# EAGLE board CSNE_Hirose_TDT_AdptBrd (EAGLE 7.4.0)
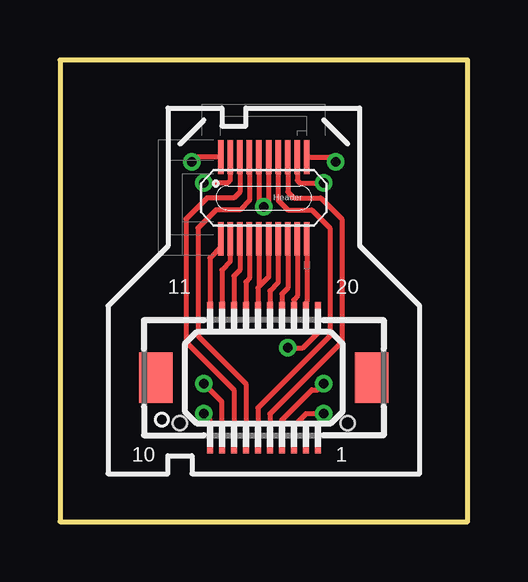
[diagram p0: board, top side]
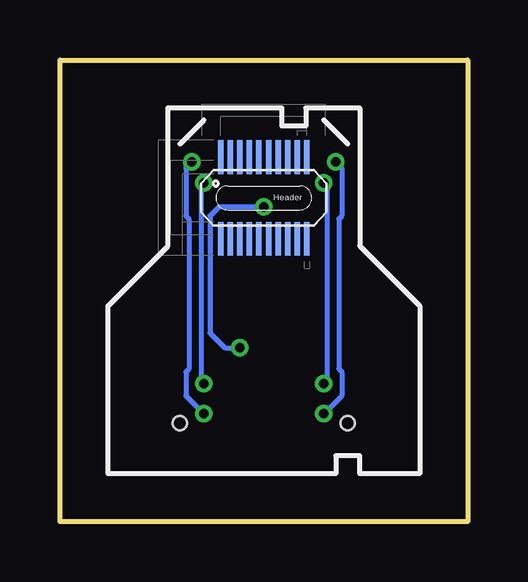
[diagram p1: board, bottom side, seen from below]

Size 17 x 19.25 mm. Coordinates in mm from the lower left corner, seen from the top.
Outline: 0,0 17,0 17,19.25 0,19.25 0,0
Copper layers (1*2*15*16): Top 0.035mm / dielectric 0.45mm / Route2 0.035mm / dielectric 0.5mm / Route15 0.035mm / dielectric 0.45mm / Bottom 0.035mm
Design rules "LaenPCBOrder_MOD_4layer": minimum track width 6mil, minimum drill 13mil, track to track 6mil, track to pad 6mil, pad to pad 6mil, via to via 6mil, smd to smd 6mil, copper to edge 15mil, drill to drill 6mil, minimum pad ring 7mil, minimum via ring 7mil, stop-mask expansion 3mil, vias tented up to drill 0mil, thermal gap 10mil

## Footprints (pad centres in the part's own frame; a part is rotated, then mirrored left to right if it is on the bottom)
DF30FC-20DP-0.4V = smd 0.23 x 1.4: P$1 -1.8,1.7; P$2 -1.4,1.7; P$3 -1,1.7; P$4 -0.6,1.7; P$5 -0.2,1.7; P$6 0.2,1.7; P$7 0.6,1.7; P$8 1,1.7; P$9 1.4,1.7; P$10 1.8,1.7; P$11 1.8,-1.7; P$12 1.4,-1.7; P$13 1,-1.7; P$14 0.6,-1.7; P$15 0.2,-1.7; P$16 -0.2,-1.7; P$17 -0.6,-1.7; P$18 -1,-1.7; P$19 -1.4,-1.7; P$20 -1.8,-1.7
CON-DF17-20F = smd 0.25 x 1.1: 1 -2.25,-2.6; 2 -2.25,2.6; 3 -1.75,-2.6; 4 -1.75,2.6; 5 -1.25,-2.6; 6 -1.25,2.6; 7 -0.75,-2.6; 8 -0.75,2.6; 9 -0.25,-2.6; 10 -0.25,2.6; 11 0.25,-2.6; 12 0.25,2.6; 13 0.75,-2.6; 14 0.75,2.6; 15 1.25,-2.6; 16 1.25,2.6; 17 1.75,-2.6; 18 1.75,2.6; 19 2.25,-2.6; 20 2.25,2.6 | smd 1.4 x 2.1: SIT1 -4.5,0; SIT2 4.5,0 | hole 0.6: -3.5,-1.9; 3.5,-1.9

## Placement (x,y rotation side)
U$1  DF30_HEADER  [DF30FC-20DP-0.4V]  8.5,13.5 0 top
U$2  DF30_HEADER  [DF30FC-20DP-0.4V]  8.5,13.5 0 bottom
U$3  CON-DF17-20F  [CON-DF17-20F]  8.5,6 0 top

## Library data of the parts
U$1 U$2 = TDT_Connectors
U$3 = hirose_DF17

## Nets
N$1: U$1.P$1 U$3.1
N$2: U$1.P$2 U$3.3
N$3: U$1.P$3 U$3.5
N$4: U$1.P$4 U$3.7
N$5: U$1.P$5 U$1.P$6 U$3.20
N$7: U$1.P$7 U$3.9
N$8: U$1.P$8 U$3.11
N$9: U$1.P$9 U$3.13
N$10: U$1.P$10 U$3.15
N$11: U$1.P$11 U$3.18
N$12: U$1.P$12 U$3.16
N$13: U$1.P$13 U$3.14
N$14: U$1.P$14 U$3.12
N$16: U$1.P$15 U$1.P$16 U$3.10
N$17: U$1.P$17 U$3.8
N$18: U$1.P$18 U$3.6
N$19: U$1.P$19 U$3.4
N$20: U$1.P$20 U$3.2

## Tracks (layer width: path | path; a pad name or v marks a point on that pad's centre or on a via)
N$1  (via drill 0.38)
  Top 0.203: U$1.P$1 5.7,15.2 v5.5,15 | U$3.1 6.25,4.25 v6,4.5
  Bottom 0.203: v5.5,15 5.25,14.75 5.25,12.75 5.38,12.62 5.38,6.38 5.25,6.25 5.25,5.25 v6,4.5
N$2  (via drill 0.38)
  Top 0.203: U$1.P$2 7.1,14.22 7,14.12 v6,14.12 | U$3.3 6.75,5 v6,5.75
  Bottom 0.203: v6,14.12 5.88,14 5.88,5.88 v6,5.75
N$3
  Top 0.203: U$1.P$3 7.5,13.75 7.25,13.5 6.12,13.5 5.25,12.62 5.25,7.5 7.25,5.5 U$3.5
N$4
  Top 0.203: U$1.P$4 7.9,13.4 7.5,13 6.5,13 5.75,12.25 5.75,7.75 7.75,5.75 U$3.7
N$5  (via drill 0.38)
  Top 0.203: U$1.P$5 8.3,13.32 v8.5,13.12 8.7,13.32 U$1.P$6 | v9.5,7.25 10.12,7.25 10.75,7.88 U$3.20
  Bottom 0.203: v8.5,13.12 10.38,13.12 10.75,12.75 10.75,7.88 10.12,7.25 v9.5,7.25
N$7
  Top 0.203: U$1.P$7 9.1,13.4 9.5,13 10.5,13 11.25,12.25 11.25,7.75 8.25,4.75 U$3.9
N$8
  Top 0.203: U$1.P$8 9.5,13.75 9.75,13.5 10.88,13.5 11.75,12.62 11.75,7.5 8.75,4.5 U$3.11
N$9  (via drill 0.38)
  Top 0.203: U$1.P$9 9.9,14.22 10,14.12 v11,14.12 | U$3.13 9.25,4.25 10.5,5.5 10.75,5.5 v11,5.75
  Bottom 0.203: v11,14.12 11.12,14 11.12,5.88 v11,5.75
N$10  (via drill 0.38)
  Top 0.203: U$1.P$10 11.3,15.2 v11.5,15 | v11,4.5 10.25,4.5 9.75,4 U$3.15
  Bottom 0.203: v11.5,15 11.75,14.75 11.75,12.75 11.62,12.62 11.62,6.38 11.75,6.25 11.75,5.25 v11,4.5
N$11
  Top 0.203: U$1.P$11 10.3,9.18 10.25,9.12 U$3.18
N$12
  Top 0.203: U$1.P$12 9.9,9.4 9.75,9.25 U$3.16
N$13
  Top 0.203: U$1.P$13 9.5,9.75 9.25,9.5 U$3.14
N$14
  Top 0.203: U$1.P$14 9.1,9.97 8.75,9.62 U$3.12
N$16
  Top 0.203: U$1.P$16 8.3,9.8 | 8.3,9.8 8.25,9.75 U$3.10 | U$1.P$15 8.7,10.2 8.3,9.8
N$17
  Top 0.203: U$1.P$17 7.9,10.15 7.75,10 U$3.8
N$18
  Top 0.203: U$1.P$18 7.5,10.5 7.25,10.25 U$3.6
N$19
  Top 0.203: U$1.P$19 7.1,10.85 6.75,10.5 U$3.4
N$20
  Top 0.203: U$1.P$20 6.7,11.45 6.25,11 U$3.2

## Text on the board
tNames: 11 | 20 | 10 | 1